# EAGLE board Main board1 (EAGLE 5.07)
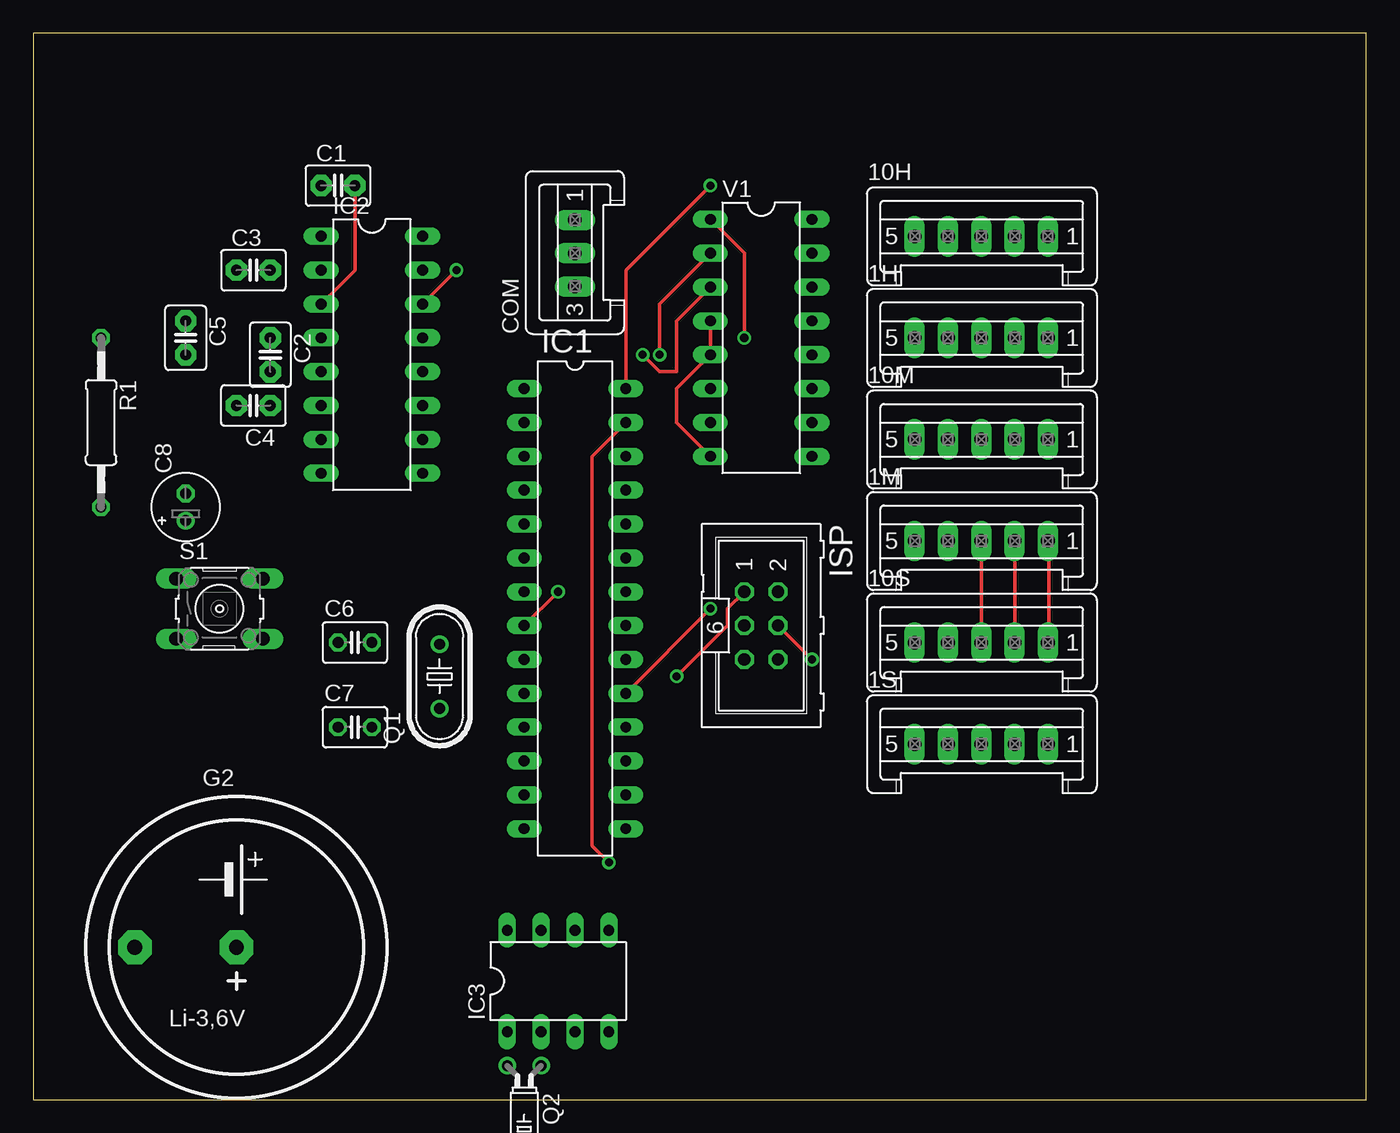
[diagram p0: board, top side]
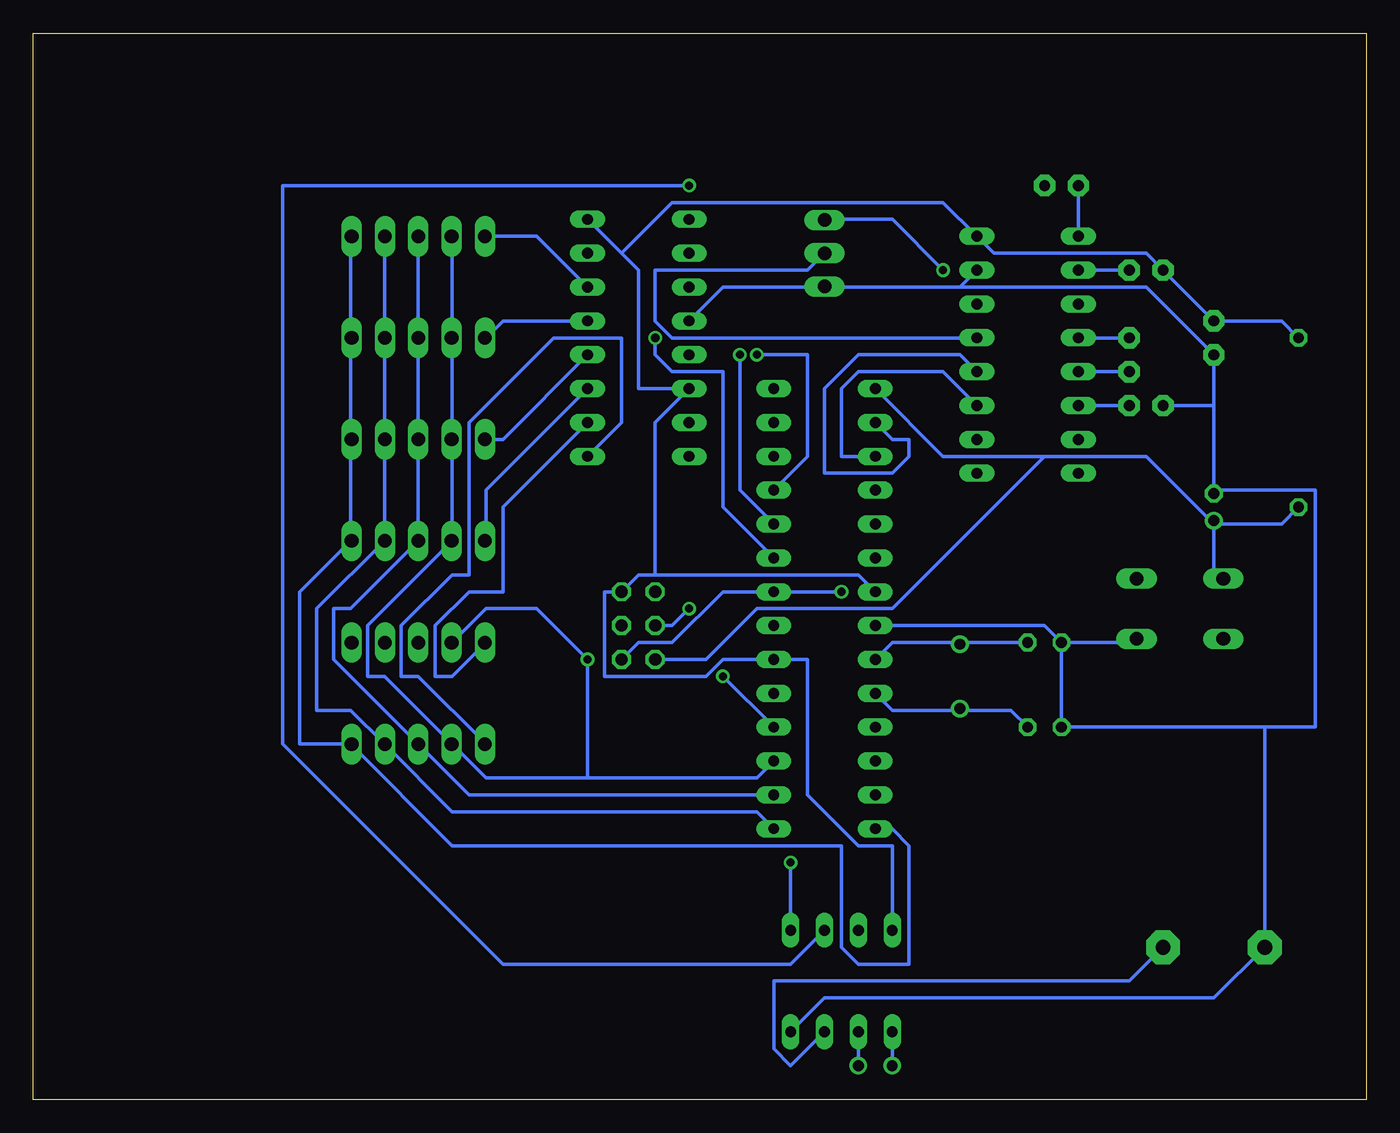
[diagram p1: board, bottom side, seen from below]

Size 100 x 80 mm. Coordinates in mm from the lower left corner, seen from the top.
Outline: 0,0 100,0 100,80 0,80 0,0
Copper layers (1*16): Top 0.035mm / dielectric 1.5mm / Bottom 0.035mm
Design rules "default": minimum track width 10mil, minimum drill 24mil, track to track 8mil, track to pad 8mil, pad to pad 8mil, via to via 8mil, smd to smd 8mil, copper to edge 40mil, drill to drill 8mil, minimum pad ring 10mil, minimum via ring 8mil, stop-mask expansion 4mil, vias tented up to drill 0mil, thermal gap 10mil

## Footprints (pad centres in the part's own frame; a part is rotated, then mirrored left to right if it is on the bottom)
S05P = drill 1.016 long: 1 5,0; 2 2.5,0; 3 0,0; 4 -2.5,0; 5 -5,0
C2.5-3 = drill 0.813 pad 1.6 octagon: 1 -1.27,0; 2 1.27,0
C025-030X050 = drill 0.813 octagon: 1 -1.27,0; 2 1.27,0
E2-5 = drill 0.813 pad 1.27 round: + -1.016,0 | drill 0.813 pad 1.27 octagon: - 1.016,0
S03P = drill 1.016 long: 1 2.5,0; 2 0,0; 3 -2.5,0
BEL/P = drill 1.118 pad 2.54 octagon: + 0,0; - -7.62,0
DIL28-3 = drill 0.813 long: 1 -16.51,-3.81; 2 -13.97,-3.81; 3 -11.43,-3.81; 4 -8.89,-3.81; 5 -6.35,-3.81; 6 -3.81,-3.81; 7 -1.27,-3.81; 8 1.27,-3.81; 9 3.81,-3.81; 10 6.35,-3.81; 11 8.89,-3.81; 12 11.43,-3.81; 13 13.97,-3.81; 14 16.51,-3.81; 15 16.51,3.81; 16 13.97,3.81; 17 11.43,3.81; 18 8.89,3.81; 19 6.35,3.81; 20 3.81,3.81; 21 1.27,3.81; 22 -1.27,3.81; 23 -3.81,3.81; 24 -6.35,3.81; 25 -8.89,3.81; 26 -11.43,3.81; 27 -13.97,3.81; 28 -16.51,3.81
DIL16 = drill 0.813 long: 1 -8.89,-3.81; 2 -6.35,-3.81; 3 -3.81,-3.81; 4 -1.27,-3.81; 5 1.27,-3.81; 6 3.81,-3.81; 7 6.35,-3.81; 8 8.89,-3.81; 9 8.89,3.81; 10 6.35,3.81; 11 3.81,3.81; 12 1.27,3.81; 13 -1.27,3.81; 14 -3.81,3.81; 15 -6.35,3.81; 16 -8.89,3.81
DIL8 = drill 0.813 long: 1 -8.89,-3.81; 2 -6.35,-3.81; 3 -3.81,-3.81; 4 -1.27,-3.81; 5 -1.27,3.81; 6 -3.81,3.81; 7 -6.35,3.81; 8 -8.89,3.81
ML6 = drill 0.914 octagon: 1 -2.54,-1.27; 2 -2.54,1.27; 3 0,-1.27; 4 0,1.27; 5 2.54,-1.27; 6 2.54,1.27
HC49U-V = drill 0.813 round: 1 -2.413,0; 2 2.413,0
TC26H = drill 0.813 round: 1 -1.27,0; 2 1.27,0
0207/12 = drill 0.813 octagon: 1 -6.35,0; 2 6.35,0
B3F-10XX = drill 1.016 long: 1 -3.251,2.261; 2 3.251,2.261; 3 -3.251,-2.261; 4 3.251,-2.261

## Placement (x,y rotation side)
1H  [S05P]  71.12,57.15 0 top
1M  [S05P]  71.12,41.91 0 top
1S  [S05P]  71.12,26.67 0 top
10H  [S05P]  71.12,64.77 0 top
10M  [S05P]  71.12,49.53 0 top
10S  [S05P]  71.12,34.29 0 top
C1  1 uF  [C2.5-3]  22.86,68.58 0 top
C2  1 uF  [C2.5-3]  17.78,55.88 270 top
C3  1 uF  [C2.5-3]  16.51,62.23 0 top
C4  1 uF  [C2.5-3]  16.51,52.07 180 top
C5  1 uF  [C2.5-3]  11.43,57.15 270 top
C6  20pF  [C025-030X050]  24.13,34.29 0 top
C7  20pF  [C025-030X050]  24.13,27.94 0 top
C8  0.1uF  [E2-5]  11.43,44.45 90 top
COM  1  [S03P]  40.64,63.5 90 top
G2  3V  [BEL/P]  15.24,11.43 0 top
IC1  MEGA8-P  [DIL28-3]  40.64,36.83 270 top
IC2  MAX232  [DIL16]  25.4,55.88 270 top
IC3  DS1307DIL8  [DIL8]  44.45,8.89 0 top
ISP  [ML6]  54.61,35.56 270 top
Q1  4MHz  [HC49U-V]  30.48,31.75 90 top
Q2  32.768kHz  [TC26H]  36.83,2.54 180 top
R1  100k  [0207/12]  5.08,50.8 270 top
S1  [B3F-10XX]  13.97,36.83 0 top
V1  74238N  [DIL16]  54.61,57.15 270 top

## Library data of the parts
1H 1M 1S 10H 10M 10S COM = con-amp-mt
C1-C5 = capacitor-wima
C6 C7 R1 = ~~rcl
C8 = rcl
G2 = battery
IC1 = atmel
IC2 = maxim
IC3 = ~~dallas
ISP = con-harting-ml
Q1 Q2 = crystal
S1 = switch-omron
V1 = 74ttl-din

## Nets
1: 10H.5 V1.14
2: 1H.5 V1.13
3: 10M.5 V1.12
4: 1M.5 V1.11
5: 10S.5 V1.10
6: 1S.5 V1.9
GND: C4.2 C5.2 C6.1 C7.1 C8.- COM.3 G2.- IC1.8 IC1.22 IC2.15 IC3.4 ISP.6 S1.4 V1.4 V1.5 V1.8
N$1: C1.1 IC2.1
N$2: C1.2 IC2.3
N$3: C2.2 IC2.5
N$4: C2.1 IC2.4
N$5: C3.2 IC2.2
N$6: C4.1 IC2.6
N$7: COM.2 IC2.13
N$8: COM.1 IC2.14
N$9: IC3.1 Q2.2
N$10: IC1.18 ISP.1
N$11: IC1.3 IC2.11
N$12: IC1.2 IC2.12
N$13: IC1.19 ISP.3
N$15: C6.2 IC1.9 Q1.2
N$16: C7.2 IC1.10 Q1.1
N$17: IC3.2 Q2.1
N$18: C8.+ IC1.1 ISP.5 R1.2 S1.1
N$19: IC1.28 IC3.6
N$20: IC1.25 V1.3
N$21: G2.+ IC3.3
N$22: IC1.27 IC3.5
N$23: IC1.24 V1.2
N$25: IC1.23 V1.1
PB0: 1H.1 1M.1 1S.1 10H.1 10M.1 10S.1 IC1.14
PB1: 1H.2 1M.2 1S.2 10H.2 10M.2 10S.2 IC1.15
PB2: 1H.3 1M.3 1S.3 10H.3 10M.3 10S.3 IC1.16
PB3: 1H.4 1M.4 1S.4 10H.4 10M.4 10S.4 IC1.17 ISP.4
VCC: C3.1 C5.1 IC1.7 IC1.20 IC2.16 IC3.8 ISP.2 R1.1 V1.6 V1.16

## Tracks (layer width: path | path; a pad name or v marks a point on that pad's centre or on a via)
1
  Bottom 0.254: V1.14 62.23,64.77 10H.5
2
  Bottom 0.254: V1.13 64.77,58.42 66.04,57.15 1H.5
3
  Bottom 0.254: V1.12 64.77,49.53 10M.5
4
  Bottom 0.254: V1.11 66.04,45.72 66.04,41.91 1M.5
5
  Bottom 0.254: V1.10 64.77,44.45 64.77,38.1 67.31,38.1 69.85,35.56 69.85,31.75 68.58,31.75 66.04,34.29 10S.5
6
  Bottom 0.254: V1.9 55.88,50.8 55.88,57.15 60.96,57.15 67.31,50.8 67.31,39.37 68.58,39.37 72.39,35.56 72.39,31.75 71.12,31.75 66.04,26.67 1S.5
GND  (via drill 0.61)
  Top 0.254: V1.8 48.26,50.8 48.26,53.34 V1.5 V1.4 | IC1.8 v39.37,38.1
  Bottom 0.254: 11.43,52.07 C5.2 16.51,60.96 30.48,60.96 | 11.43,45.72 11.43,52.07 | 11.43,52.07 C4.2 | 30.48,60.96 IC2.15 | 30.48,60.96 40.64,60.96 | V1.4 48.26,60.96 40.64,60.96 | 40.64,60.96 COM.3 | IC3.4 40.64,7.62 11.43,7.62 G2.- 7.62,27.94 | ISP.6 54.61,34.29 52.07,34.29 48.26,38.1 IC1.22 v39.37,38.1 | C6.1 C7.1 7.62,27.94 | IC1.8 24.13,35.56 C6.1 | C6.1 17.78,34.29 S1.4 | 11.43,45.72 3.81,45.72 3.81,27.94 7.62,27.94 | 11.43,45.72 C8.-
N$1
  Bottom 0.254: IC2.1 C1.1
N$2
  Top 0.254: IC2.3 24.13,62.23 C1.2
N$3
  Bottom 0.254: C2.2 IC2.5
N$4
  Bottom 0.254: C2.1 IC2.4
N$5
  Bottom 0.254: C3.2 IC2.2
N$6
  Bottom 0.254: C4.1 IC2.6
N$7
  Bottom 0.254: IC2.13 52.07,57.15 53.34,58.42 53.34,62.23 41.91,62.23 COM.2
N$8  (via drill 0.61)
  Top 0.254: IC2.14 v31.75,62.23
  Bottom 0.254: v31.75,62.23 35.56,66.04 40.64,66.04 COM.1
N$9
  Bottom 0.254: Q2.2 IC3.1
N$10  (via drill 0.61)
  Top 0.254: v48.26,31.75 52.07,35.56 52.07,36.83 ISP.1
  Bottom 0.254: IC1.18 v48.26,31.75
N$11
  Bottom 0.254: IC2.11 31.75,54.61 38.1,54.61 39.37,53.34 39.37,48.26 IC1.3
N$12
  Bottom 0.254: IC2.12 30.48,55.88 38.1,55.88 40.64,53.34 40.64,46.99 35.56,46.99 34.29,48.26 34.29,49.53 35.56,49.53 IC1.2
N$13  (via drill 0.61)
  Top 0.254: IC1.19 v50.8,36.83
  Bottom 0.254: v50.8,36.83 52.07,35.56 ISP.3
N$15
  Bottom 0.254: C6.2 30.48,34.29 | IC1.9 35.56,34.29 30.48,34.29 | 30.48,34.29 Q1.2
N$16
  Bottom 0.254: C7.2 26.67,29.21 30.48,29.21 | IC1.10 35.56,29.21 30.48,29.21 | 30.48,29.21 Q1.1
N$17
  Bottom 0.254: Q2.1 IC3.2
N$18
  Bottom 0.254: 11.43,43.18 11.43,39.37 S1.1 | R1.2 6.35,43.18 11.43,43.18 | IC1.1 31.75,48.26 24.13,48.26 | 24.13,48.26 16.51,48.26 11.43,43.18 | 11.43,43.18 C8.+ | ISP.5 49.53,33.02 45.72,36.83 35.56,36.83 24.13,48.26
N$19  (via drill 0.61)
  Top 0.254: v50.8,68.58 44.45,62.23 IC1.28
  Bottom 0.254: IC3.6 43.18,10.16 64.77,10.16 81.28,26.67 81.28,68.58 v50.8,68.58
N$20  (via drill 0.61)
  Top 0.254: v45.72,55.88 46.99,54.61 48.26,54.61 48.26,58.42 V1.3
  Bottom 0.254: IC1.25 41.91,48.26 41.91,55.88 v45.72,55.88
N$21
  Bottom 0.254: IC3.3 43.18,2.54 44.45,3.81 44.45,8.89 17.78,8.89 G2.+
N$22  (via drill 0.61)
  Top 0.254: v43.18,17.78 41.91,19.05 41.91,48.26 IC1.27
  Bottom 0.254: IC3.5 v43.18,17.78
N$23  (via drill 0.61)
  Top 0.254: v46.99,55.88 46.99,59.69 V1.2
  Bottom 0.254: IC1.24 46.99,45.72 v46.99,55.88
N$25  (via drill 0.61)
  Top 0.254: v53.34,57.15 53.34,63.5 V1.1
  Bottom 0.254: IC1.23 48.26,44.45 48.26,54.61 52.07,54.61 53.34,55.88 v53.34,57.15
PB0
  Top 0.254: 10S.1 76.2,34.29 76.2,41.91 1M.1
  Bottom 0.254: 76.2,49.53 76.2,57.15 | 76.2,57.15 76.2,64.77 10H.1 | 76.2,57.15 1H.1 | 76.2,41.91 76.2,49.53 | 76.2,49.53 10M.1 | IC1.14 35.56,20.32 34.29,19.05 34.29,10.16 38.1,10.16 39.37,11.43 39.37,19.05 68.58,19.05 76.2,26.67 | 76.2,41.91 80.01,38.1 80.01,26.67 76.2,26.67 | 76.2,41.91 1M.1 | 76.2,26.67 1S.1
PB1
  Top 0.254: 10S.2 73.66,34.29 73.66,41.91 1M.2
  Bottom 0.254: 73.66,49.53 73.66,57.15 | 73.66,57.15 73.66,64.77 10H.2 | 73.66,57.15 1H.2 | 73.66,41.91 73.66,49.53 | 73.66,49.53 10M.2 | IC1.15 45.72,21.59 68.58,21.59 73.66,26.67 | 73.66,41.91 78.74,36.83 78.74,29.21 76.2,29.21 73.66,26.67 | 73.66,41.91 1M.2 | 73.66,26.67 1S.2
PB2
  Top 0.254: 1M.3 10S.3
  Bottom 0.254: IC1.16 67.31,22.86 1S.3 77.47,33.02 77.47,36.83 76.2,36.83 1M.3 10M.3 1H.3 10H.3
PB3  (via drill 0.61)
  Top 0.254: v58.42,33.02 ISP.4
  Bottom 0.254: 68.58,41.91 68.58,49.53 | 68.58,57.15 68.58,64.77 10H.4 | 68.58,49.53 68.58,57.15 | 68.58,49.53 10M.4 | 68.58,57.15 1H.4 | IC1.17 45.72,24.13 58.42,24.13 | 58.42,24.13 66.04,24.13 68.58,26.67 | 58.42,24.13 v58.42,33.02 62.23,36.83 66.04,36.83 68.58,34.29 10S.4 | 68.58,41.91 74.93,35.56 74.93,31.75 73.66,31.75 68.58,26.67 | 68.58,41.91 1M.4 | 68.58,26.67 1S.4
VCC
  Bottom 0.254: R1.1 6.35,58.42 C5.1 C3.1 16.51,63.5 27.94,63.5 IC2.16 31.75,67.31 52.07,67.31 55.88,63.5 | IC3.8 35.56,19.05 38.1,19.05 41.91,22.86 41.91,33.02 IC1.20 48.26,33.02 49.53,31.75 57.15,31.75 57.15,38.1 ISP.2 54.61,39.37 53.34,39.37 | IC1.7 38.1,39.37 53.34,39.37 | 53.34,39.37 53.34,50.8 V1.6 54.61,53.34 54.61,62.23 55.88,63.5 | 55.88,63.5 V1.16